# EAGLE board SA Board (EAGLE 6.5.0)
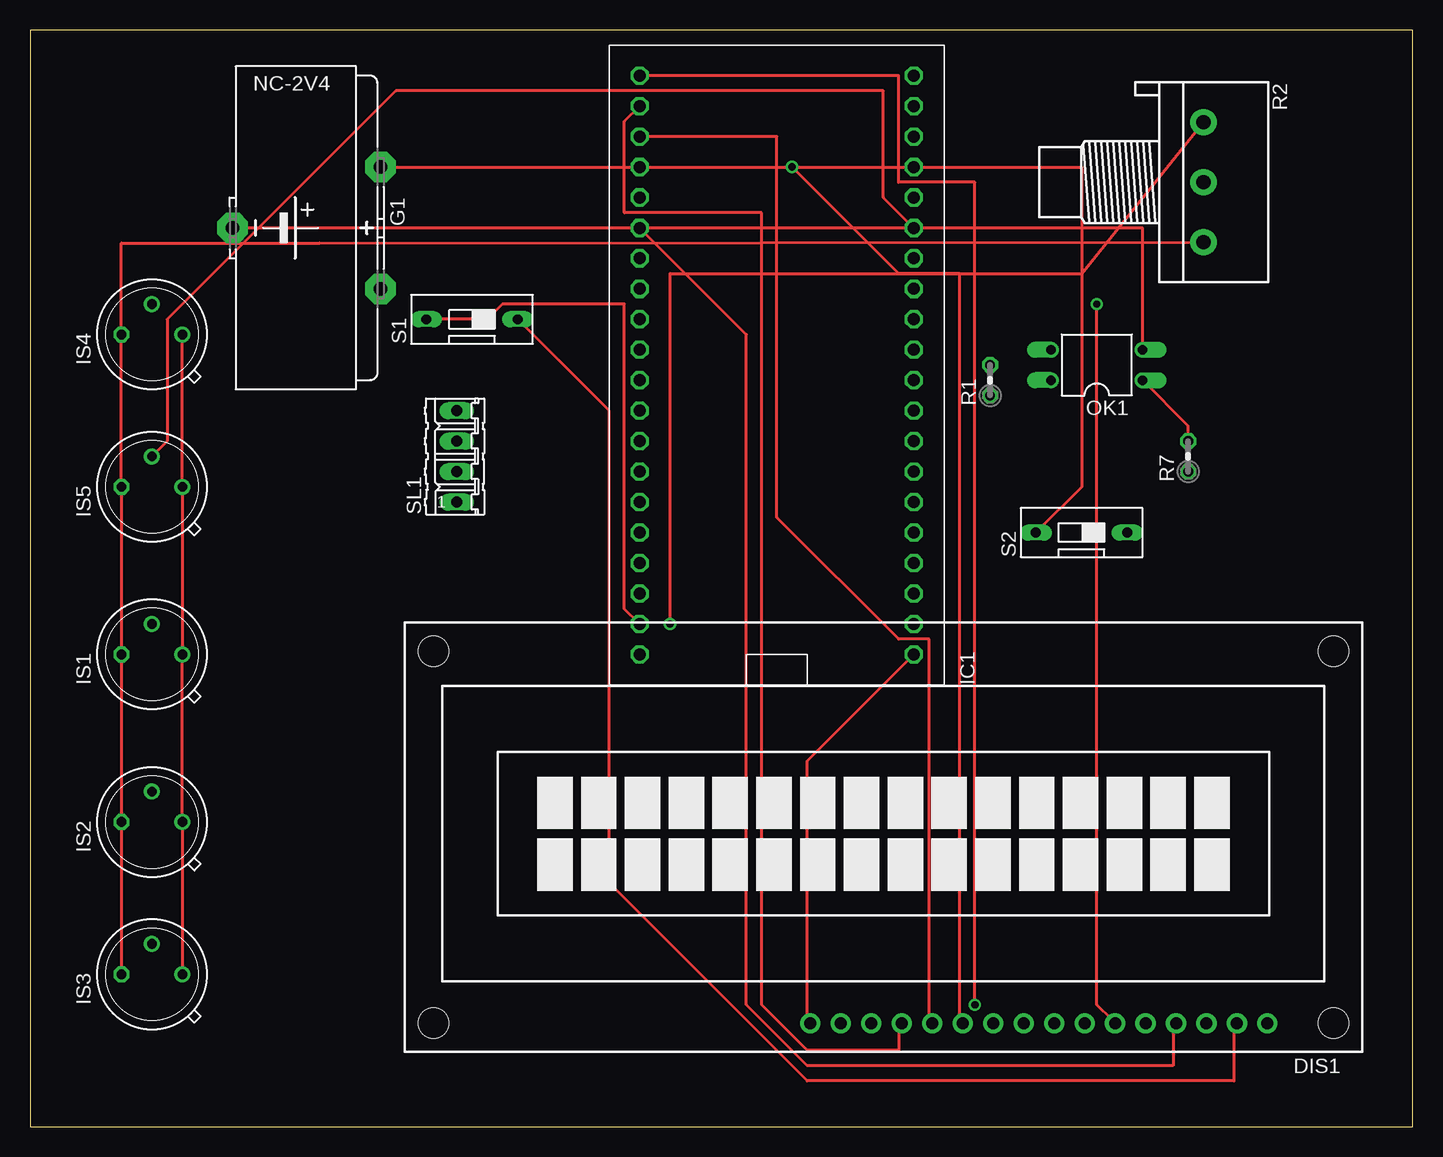
[diagram p0: board, top side]
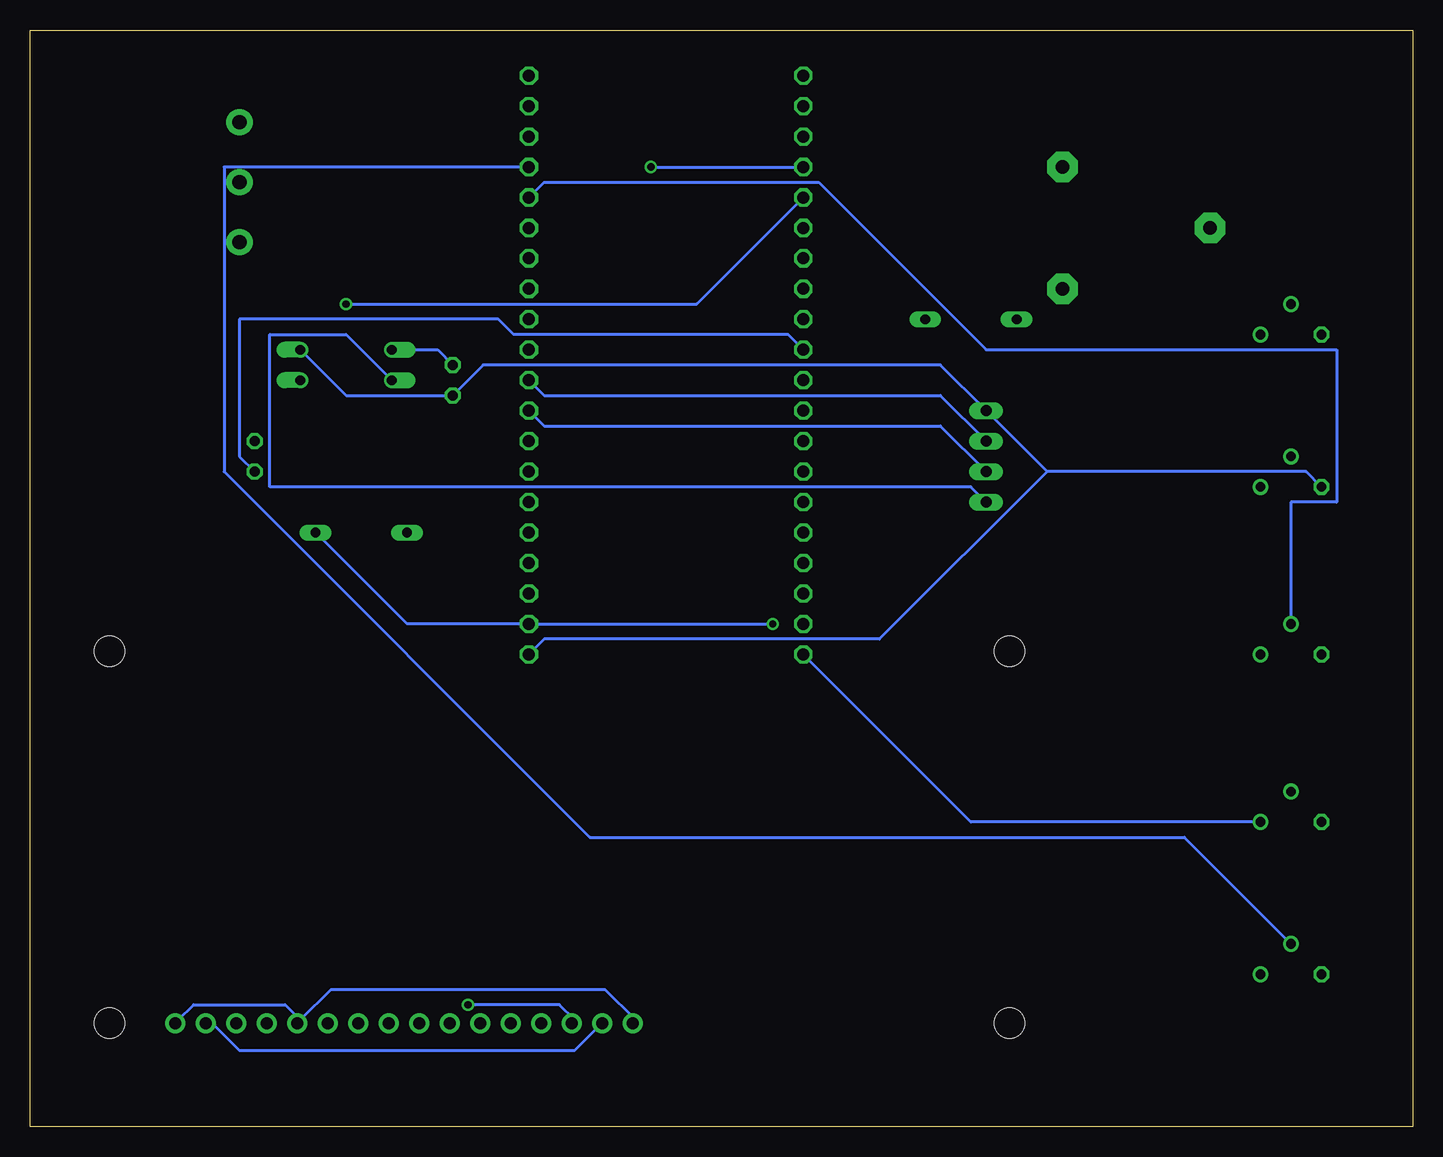
[diagram p1: board, bottom side, seen from below]

Size 115.24 x 91.43 mm. Coordinates in mm from the lower left corner, seen from the top.
Outline: 0,0 115.24,0 115.24,91.43 0,91.43 0,0
Copper layers (1*16): Top 0.035mm / dielectric 1.5mm / Bottom 0.035mm
Design rules "default": minimum track width 10mil, minimum drill 24mil, track to track 8mil, track to pad 8mil, pad to pad 8mil, via to via 8mil, smd to smd 8mil, copper to edge 40mil, drill to drill 8mil, minimum pad ring 10mil, minimum via ring 8mil, stop-mask expansion 4mil, vias tented up to drill 0mil, thermal gap 10mil

## Footprints (pad centres in the part's own frame; a part is rotated, then mirrored left to right if it is on the bottom)
TUXGR_16X2_R2 = drill 1 pad 1.676: 1 -32,15.5; 2 -29.46,15.5; 3 -26.92,15.5; 4 -24.38,15.5; 5 -21.84,15.5; 6 -19.3,15.5; 7 -16.76,15.5; 8 -14.22,15.5; 9 -11.68,15.5; 10 -9.14,15.5; 11 -6.6,15.5; 12 -4.06,15.5; 13 -1.52,15.5; 14 1.02,15.5; 15 3.56,15.5; 16 6.1,15.5 | hole 2.5: -37.5,-15.5; 37.5,-15.5; -37.5,15.5; 37.5,15.5
2V110R = drill 1.118 pad 2.54 octagon: + -5.08,-5.08; +@1 -5.08,5.08; - 7.239,0
DIL40_0.9 = drill 1 pad 1.397 octagon: 1 -22.86,-11.43; 2 -20.32,-11.43; 3 -17.78,-11.43; 4 -15.24,-11.43; 5 -12.7,-11.43; 6 -10.16,-11.43; 7 -7.62,-11.43; 8 -5.08,-11.43; 9 -2.54,-11.43; 10 0,-11.43; 11 2.54,-11.43; 12 5.08,-11.43; 13 7.62,-11.43; 14 10.16,-11.43; 15 12.7,-11.43; 16 15.24,-11.43; 17 17.78,-11.43; 18 20.32,-11.43; 19 22.86,-11.43; 20 25.4,-11.43; 21 25.4,11.43; 22 22.86,11.43; 23 20.32,11.43; 24 17.78,11.43; 25 15.24,11.43; 26 12.7,11.43; 27 10.16,11.43; 28 7.62,11.43; 29 5.08,11.43; 30 2.54,11.43; 31 0,11.43; 32 -2.54,11.43; 33 -5.08,11.43; 34 -7.62,11.43; 35 -10.16,11.43; 36 -12.7,11.43; 37 -15.24,11.43; 38 -17.78,11.43; 39 -20.32,11.43; 40 -22.86,11.43
TO39 = drill 0.813: 1 0,-2.54; 2 2.54,0 | drill 0.813 octagon: 3 0,2.54
DIL04 = drill 0.813 offset: 1 -1.27,-3.81; 2 1.27,-3.81; 3 1.27,3.81; 4 -1.27,3.81
0204V = drill 0.813 octagon: 1 -1.27,0; 2 1.27,0
3RP/1610N = drill 1.2 pad 2.184: 1 -5,0; 2 0,0; 3 5,0
DS-01 = drill 0.813 long: 1 0,-3.81; 2 0,3.81
04P = drill 0.914 long: 1 -3.81,0; 2 -1.27,0; 3 1.27,0; 4 3.81,0

## Placement (x,y rotation side)
DIS1  TUXGR_16X2_R2  [TUXGR_16X2_R2]  71.12,24.13 180 top
G1  2V110R  [2V110R]  24.13,74.93 180 top
IC1  MBED-NXP-LPC11U24  [DIL40_0.9]  62.23,62.23 90 top
IS1  LME-346-F  [TO39]  10.16,39.37 90 top
IS2  LME-346-F  [TO39]  10.16,25.4 90 top
IS3  LME-346-F  [TO39]  10.16,12.7 90 top
IS4  LME-346-F  [TO39]  10.16,66.04 90 top
IS5  LME-346-F  [TO39]  10.16,53.34 90 top
OK1  PC817  [DIL04]  88.9,63.5 90 top
R1  [0204V]  80.01,62.23 90 top
R2  [3RP/1610N]  97.79,78.74 270 top
R7  [0204V]  96.52,55.88 90 top
S1  [DS-01]  36.83,67.31 90 top
S2  [DS-01]  87.63,49.53 90 top
SL1  [04P]  35.56,55.88 90 top

## Library data of the parts
DIS1 = display-lcd; OC_FARNELL: unknown; OC_NEWARK: unknown
G1 = battery
IC1 = mbed-microcontroller
IS1-IS5 = sensor-infratec; OC_FARNELL: unknown; OC_NEWARK: unknown
OK1 = optocoupler; MPN: PC817X4J000F; OC_FARNELL: 9707727; OC_NEWARK: 97K7059
R1 R7 = resistor
R2 = pot
S1 S2 = switch-dil; OC_FARNELL: unknown; OC_NEWARK: unknown
SL1 = con-amp-quick; OC_FARNELL: unknown; OC_NEWARK: unknown

## Nets
5V: DIS1.2 DIS1.15 S1.1
+5V: OK1.4 SL1.1
GND: DIS1.1 DIS1.5 DIS1.16 G1.- IC1.1 IS1.3 IS2.3 IS3.3 IS4.3 IS5.3 OK1.2 R1.1 R2.3 SL1.4
N$1: OK1.3 R1.2
N$3: IC1.15 IS5.2
N$4: IC1.39 S1.2
N$5: DIS1.14 IC1.21
N$6: DIS1.13 IC1.22
N$7: DIS1.12 IC1.23
N$8: DIS1.11 IC1.24
N$9: DIS1.6 IC1.25
N$10: DIS1.4 IC1.26
N$11: IS2.2
N$12: IC1.9 SL1.2
N$13: IC1.16 IS1.2
N$14: IC1.17 IS3.2
N$15: IC1.10 SL1.3
N$16: IS4.2
N$17: R2.2
N$19: DIS1.3
N$20: IC1.40 IS1.1 IS2.1 IS3.1 IS4.1 IS5.1
N$22: IC1.2 R2.1 S2.1
N$23: G1.+ S2.2
N$25: IC1.30 R7.1
N$26: OK1.1 R7.2

## Tracks (layer width: path | path; a pad name or v marks a point on that pad's centre or on a via)
5V
  Top 0.254: S1.1 48.26,59.69 48.26,20.32 64.77,3.81 100.33,3.81 100.33,8.89 DIS1.2
  Bottom 0.254: DIS1.15 67.31,8.89 69.85,6.35 97.79,6.35 100.33,8.89 DIS1.2
+5V
  Bottom 0.254: OK1.4 88.9,66.04 95.25,66.04 95.25,53.34 36.83,53.34 SL1.1
GND
  Top 0.254: IC1.1 64.77,30.48 64.77,8.89 DIS1.16 | OK1.2 92.71,74.93 G1.- | IS3.3 IS2.3 IS1.3 IS5.3 IS4.3 7.62,73.66 24.13,73.66 R2.3
  Bottom 0.254: 92.71,8.89 93.98,10.16 101.6,10.16 102.87,8.89 DIS1.1 | 92.71,8.89 90.17,11.43 67.31,11.43 64.77,8.89 DIS1.16 | 92.71,8.89 DIS1.5 | OK1.2 88.9,60.96 R1.1 77.47,63.5 39.37,63.5 SL1.4 30.48,54.61 | 30.48,54.61 8.89,54.61 IS5.3 | IC1.1 72.39,40.64 44.45,40.64 30.48,54.61
N$1
  Bottom 0.254: R1.2 81.28,64.77 OK1.3
N$3
  Top 0.254: IS5.2 11.43,57.15 11.43,67.31 30.48,86.36 71.12,86.36 71.12,77.47 IC1.15
N$4
  Top 0.254: S1.2 38.1,67.31 39.37,68.58 49.53,68.58 49.53,43.18 IC1.39
N$5  (via drill 0.61)
  Top 0.254: IC1.21 72.39,87.63 72.39,78.74 78.74,78.74 v78.74,10.16
  Bottom 0.254: v78.74,10.16 71.12,10.16 69.85,8.89 DIS1.14
N$6
  Top 0.254: IC1.22 49.53,83.82 49.53,76.2 60.96,76.2 60.96,10.16 64.77,6.35 72.39,6.35 72.39,8.89 DIS1.13
N$7
  Top 0.254: IC1.23 62.23,82.55 62.23,50.8 72.39,40.64 74.93,40.64 74.93,8.89 DIS1.12
N$8  (via drill 0.61)
  Top 0.254: v63.5,80.01 72.39,71.12 77.47,71.12 77.47,8.89 DIS1.11
  Bottom 0.254: v63.5,80.01 IC1.24
N$9  (via drill 0.61)
  Top 0.254: v88.9,68.58 88.9,10.16 90.17,8.89 DIS1.6
  Bottom 0.254: IC1.25 59.69,68.58 v88.9,68.58
N$10
  Top 0.254: IC1.26 59.69,66.04 59.69,10.16 64.77,5.08 95.25,5.08 95.25,8.89 DIS1.4
N$12
  Bottom 0.254: SL1.2 39.37,58.42 72.39,58.42 IC1.9
N$13
  Bottom 0.254: IS1.2 10.16,52.07 6.35,52.07 6.35,64.77 35.56,64.77 49.53,78.74 72.39,78.74 IC1.16
N$14
  Bottom 0.254: IS3.2 19.05,24.13 68.58,24.13 99.06,54.61 99.06,80.01 IC1.17
N$15
  Bottom 0.254: SL1.3 39.37,60.96 72.39,60.96 IC1.10
N$20
  Top 0.254: IS4.1 IS5.1 IS1.1 IS2.1 IS3.1
  Bottom 0.254: IC1.40 36.83,25.4 IS2.1
N$22  (via drill 0.61)
  Top 0.254: v53.34,41.91 53.34,71.12 87.63,71.12 R2.1
  Bottom 0.254: S2.1 83.82,41.91 IC1.2 v53.34,41.91
N$23
  Top 0.254: S2.2 87.63,53.34 87.63,80.01 G1.+
N$25
  Bottom 0.254: R7.1 97.79,55.88 97.79,67.31 76.2,67.31 74.93,66.04 52.07,66.04 IC1.30
N$26
  Top 0.254: OK1.1 96.52,58.42 R7.2